# Altium PCB riglab_dynamic_scales_wifi_3ch .PcbDoc (part 2 of 3)
Units mm, origin at the board's own origin, x right, y up, seen from the top; angles counter-clockwise.
Board outline 130 x 80 mm, 4 copper layers (Top Layer, POWER, GND, Bottom Layer 1), stack 1.729 mm thick; 252 components, 202 nets, 899 pads, 104 vias.
Unrouted connection lines stored in the file: 235.
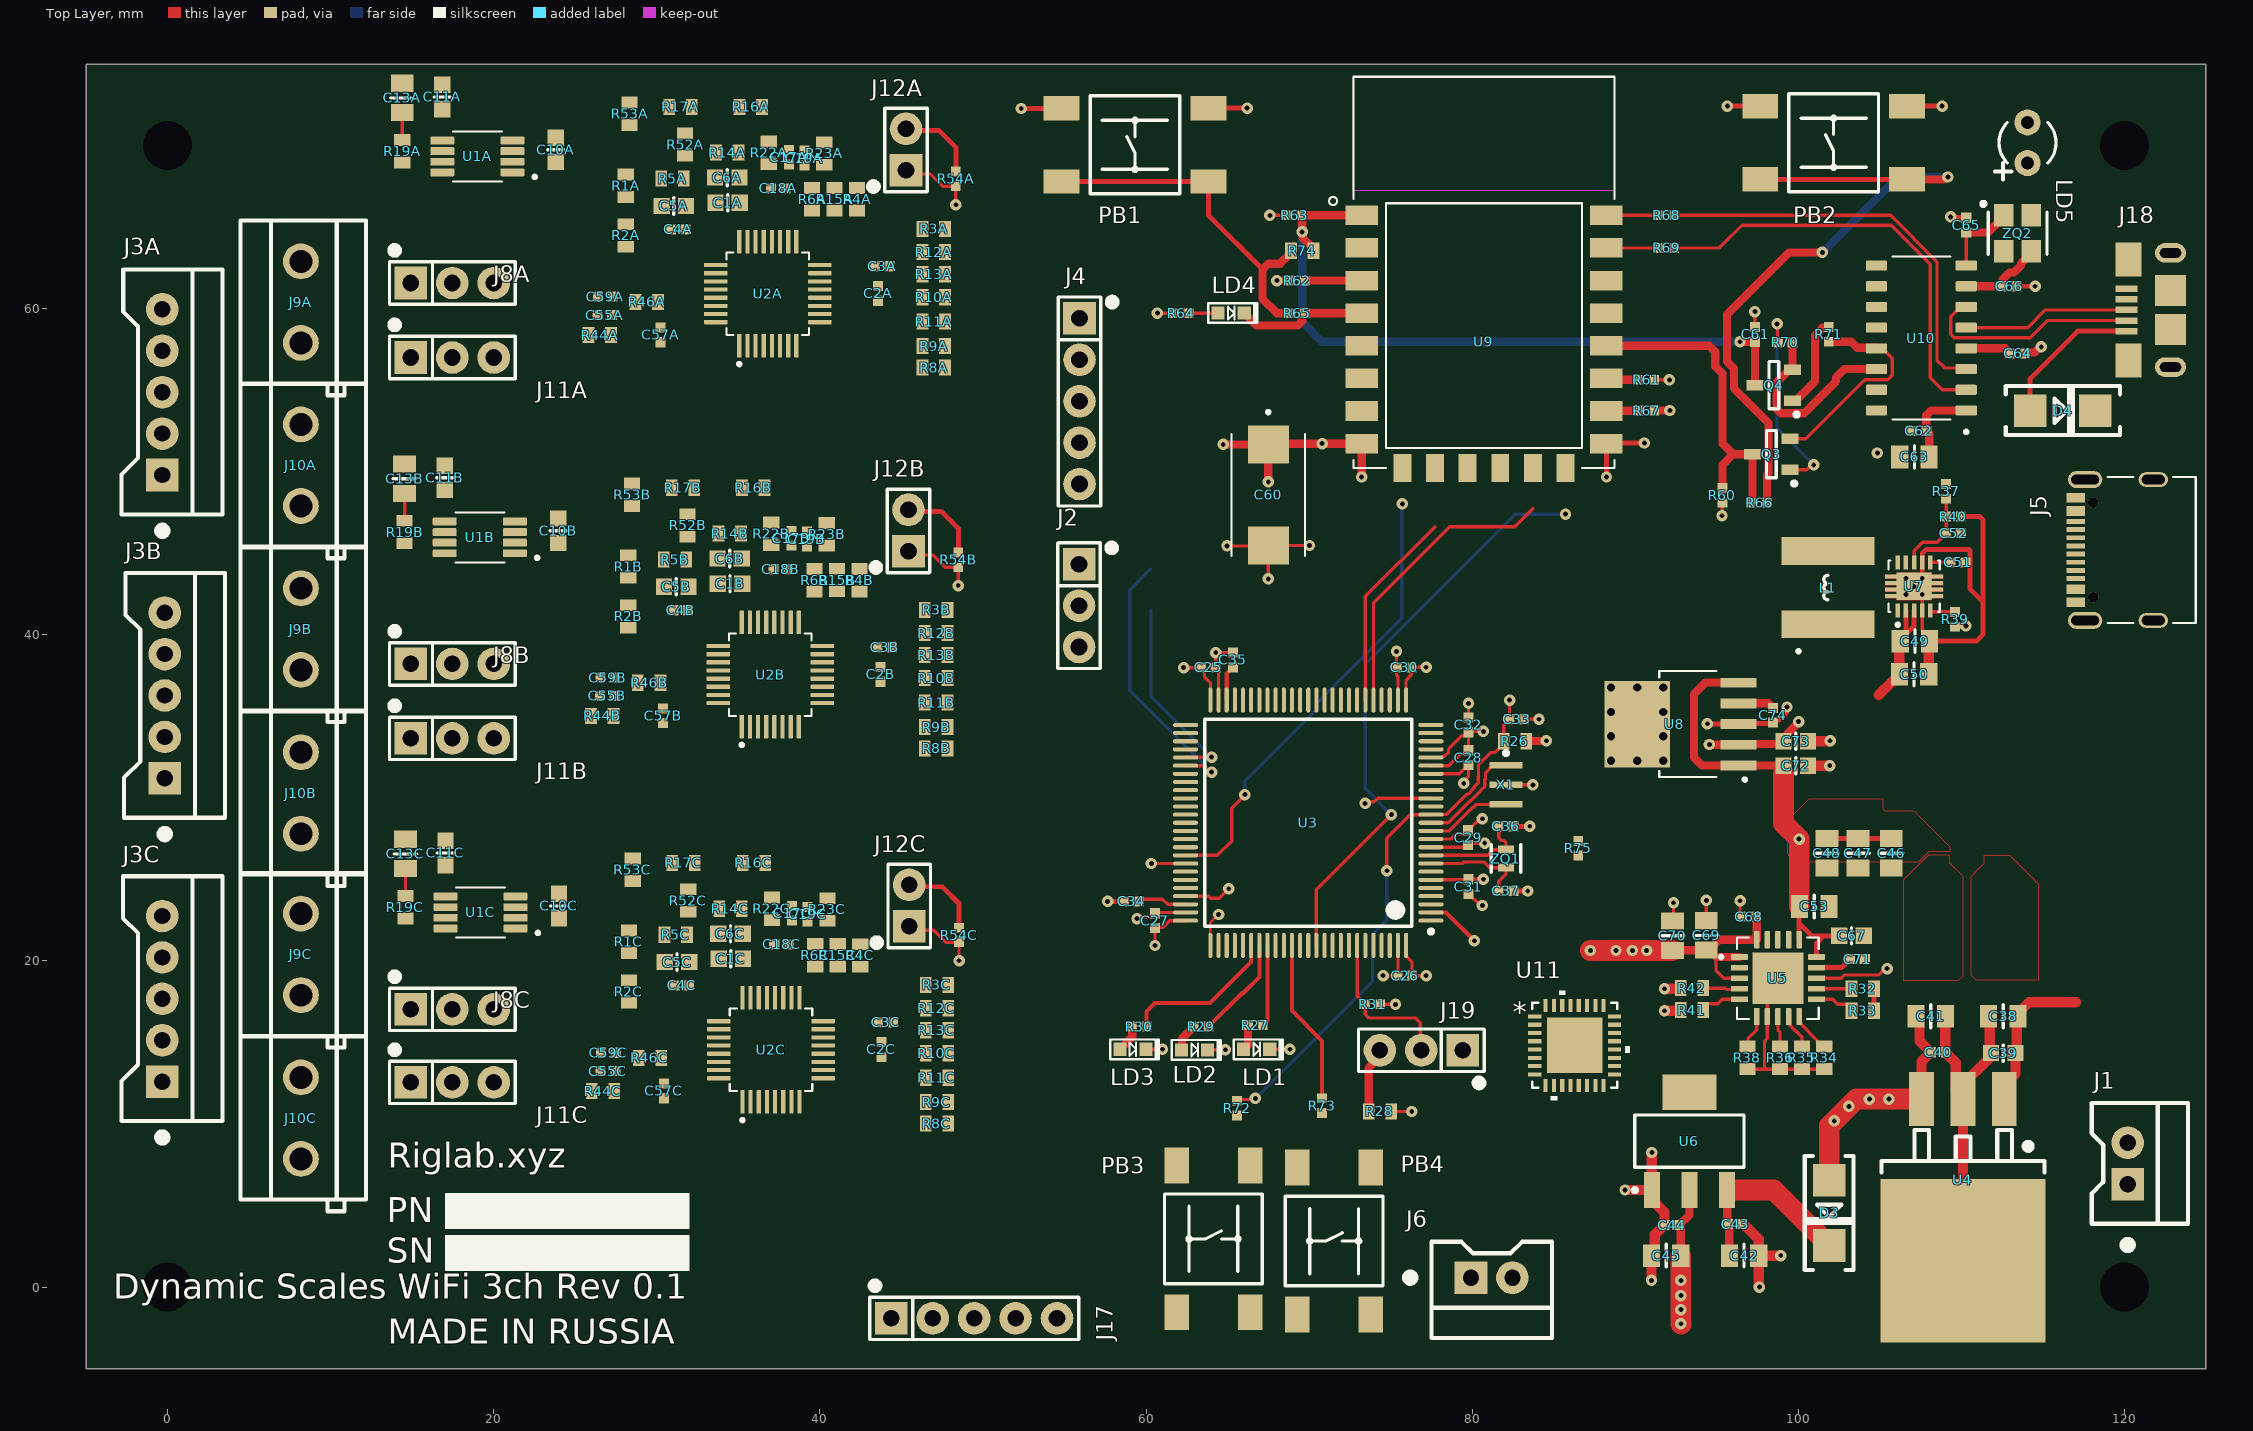
[diagram p0: Top Layer view]

## Part data (continued)
LD5: library part GNL-3012GD, "DIODE GREEN", Forward Current=30mA, Manufacturer="G-NOR OPTOELECTRONICS", Reverse Current=10uA, Reverse Voltage=5V, Author="Krepak V.", Color=Green, CreateDate=25.08.2020, Datasheet URL=#https://static.chipdip.ru/lib/773/DOC002773602.pdf#, Device=GREEN, Distributor=chipdip, DistributorURL=#https://www.chipdip.ru/product/gnl-3012gd#, ID=2, LatestRevisionDate=25.08.2020, Luminous Flux=7uCd, Manufacturer Part Number=GNL-3012GD, Notes="565nm 60deg", Number of LEDs=1, Packaging Type=Bulk, Part Number=GNL-3012GD, Price=0, Price2=0, Price3=0, Series=GNL-3012xx, SMD=No, Status=Active, Table="Diodes THM - Светодиоды", Type=Diode
PB1 PB2 PB3 PB4: "Tactile Switch SPST-NO Top Actuated Surface Mount", Limit Current=50mA, Limit Voltage=24VDC, Manufacturer="Te Connectivity", Working Temperature Max=+85°С, Working Temperature Min=-35°С, Author="Krepak V.", CreateDate=31.08.2020, Datasheet URL=#https://www.terraelectronica.ru/pdf/show?pdf_file=http%253A%252F%252Fwww.farnell.com%252Fcad%252F1922404.pdf#, Device=TACT, Distributor=terraelectronica, DistributorURL=#https://www.terraelectronica.ru/product/972320#, ID=3, Manufacturer Part Number=FSM6JSMATR, Part Number=FSM6JSMATR, Price=0, Price2=0, Price3=0, Series=FSMJSM, SMD=Yes, Status=Active, Table="Misc - Переключатели Кнопочные", Type=Misc
Q3 Q4: library part BC847,215, "Bipolar (BJT) Transistor NPN 45V 100mA 100MHz 250mW Surface Mount TO-236AB", Collector Current Cutoff="15nA (ICBO)", DC Current Gain (Min)="110 @ 2mA, 5V", Frequency - Transition=100MHz, Manufacturer=Nexperia, Max Collector Current=100mA, Supplier Part Number 1=1727-4855-2-ND, Total Power Dissipation=250mW, Working Temperature Max="+150°С (JT)", Working Temperature Min=-40°С, Author="Krepak V.", CreateDate=18.08.2020, Datasheet URL=#https://static.chipdip.ru/lib/583/DOC001583029.pdf#, Datasheet Version="Rev. 9 — 23 September 2014", Device=NPN, ID=3, LatestRevisionDate=18.08.2020, Manufacturer Part Number=BC847,215, Packaging Type=Tape&Reel, Part Number=BC847,215, Price=0, Price2=0, Price3=0, Series="Automotive, AEC-Q101", SMD=Yes, Status=Active, Supplier 1=Digikey, Table="Transistor SMT - BJT", Type=Transistor, Vce Breakdown=45V, Vce Saturation="400mV @ 5mA, 100mA"

## Text inside footprints (layer, text, board x,y; h text height)
U11: Top Overlay "*" at 82.476,16.216 h1.27; Top 3D Body "*" at 83.924,16.216 h1.27